# Altium PCB PCB_Bonjour.PcbDoc
Units mm, origin at the board's own origin, x right, y up, seen from the top; angles counter-clockwise.
Board outline 152.4 x 101.6 mm, 2 copper layers (Top Layer, Bottom Layer); 47 components, 43 nets, 163 pads, 0 vias.
Unrouted connection lines stored in the file: 84.
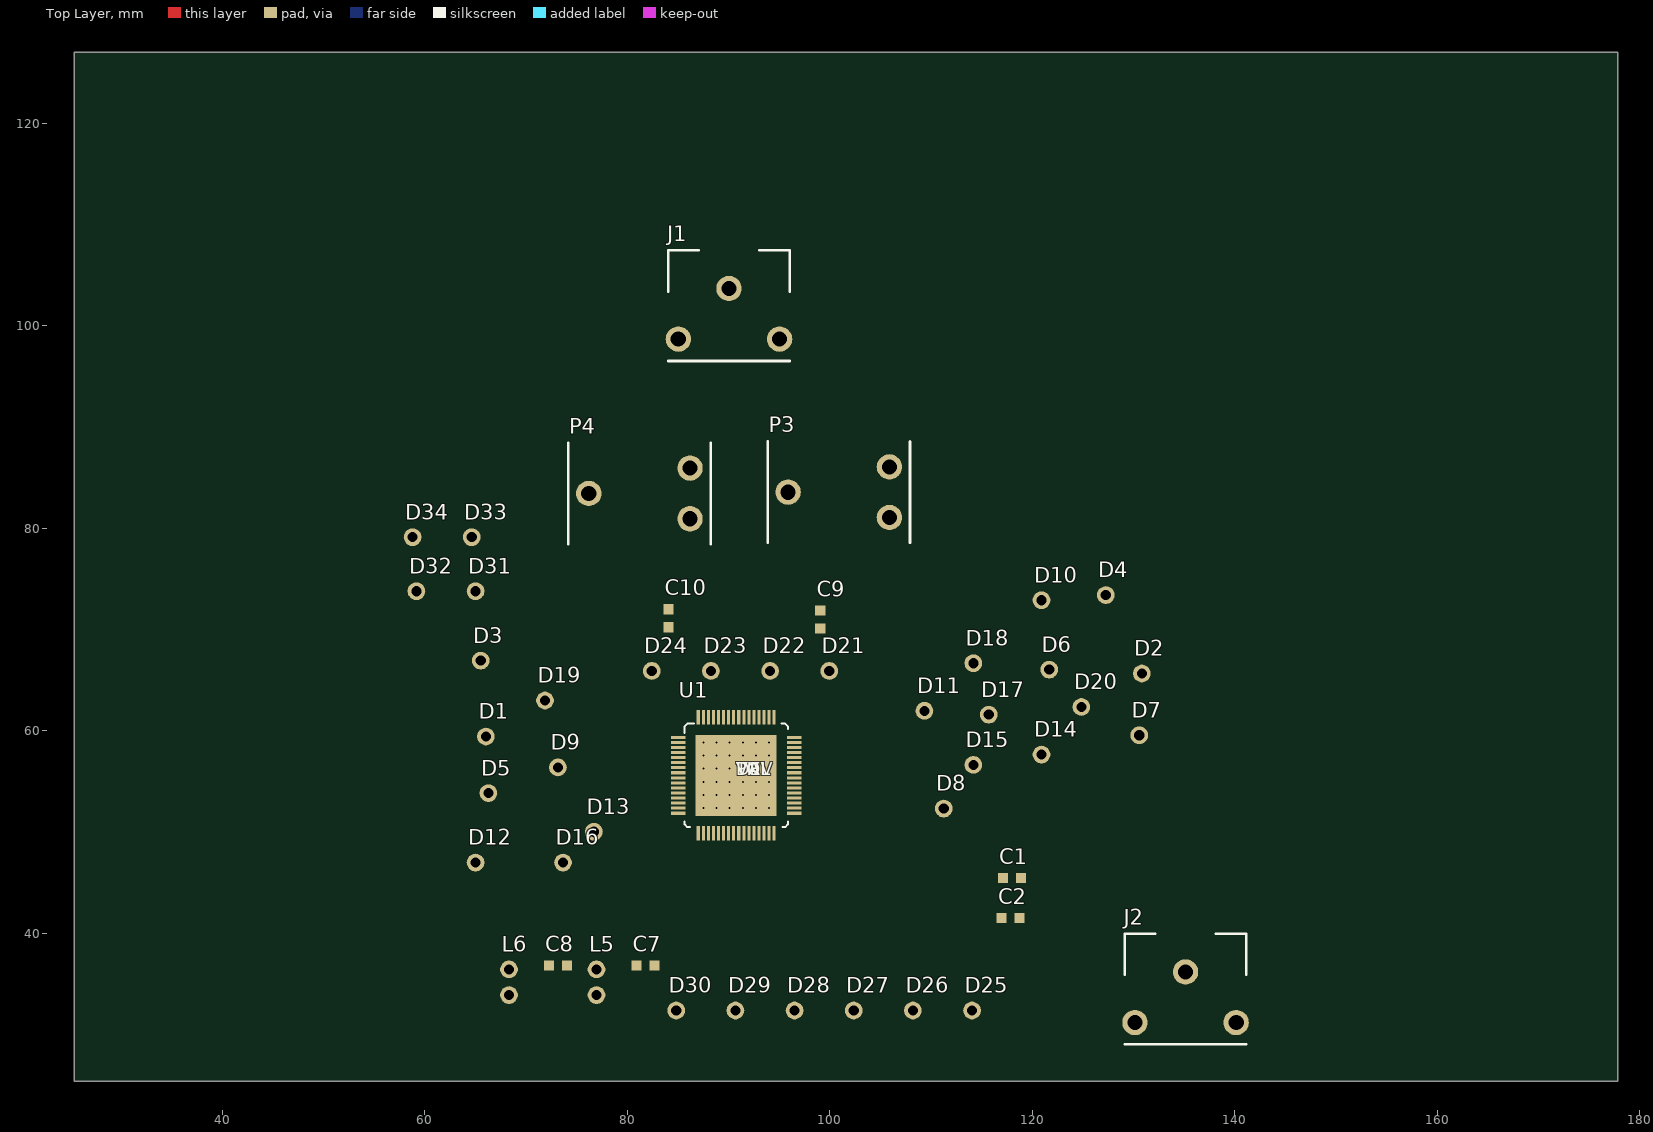
[diagram p0: Top Layer view]
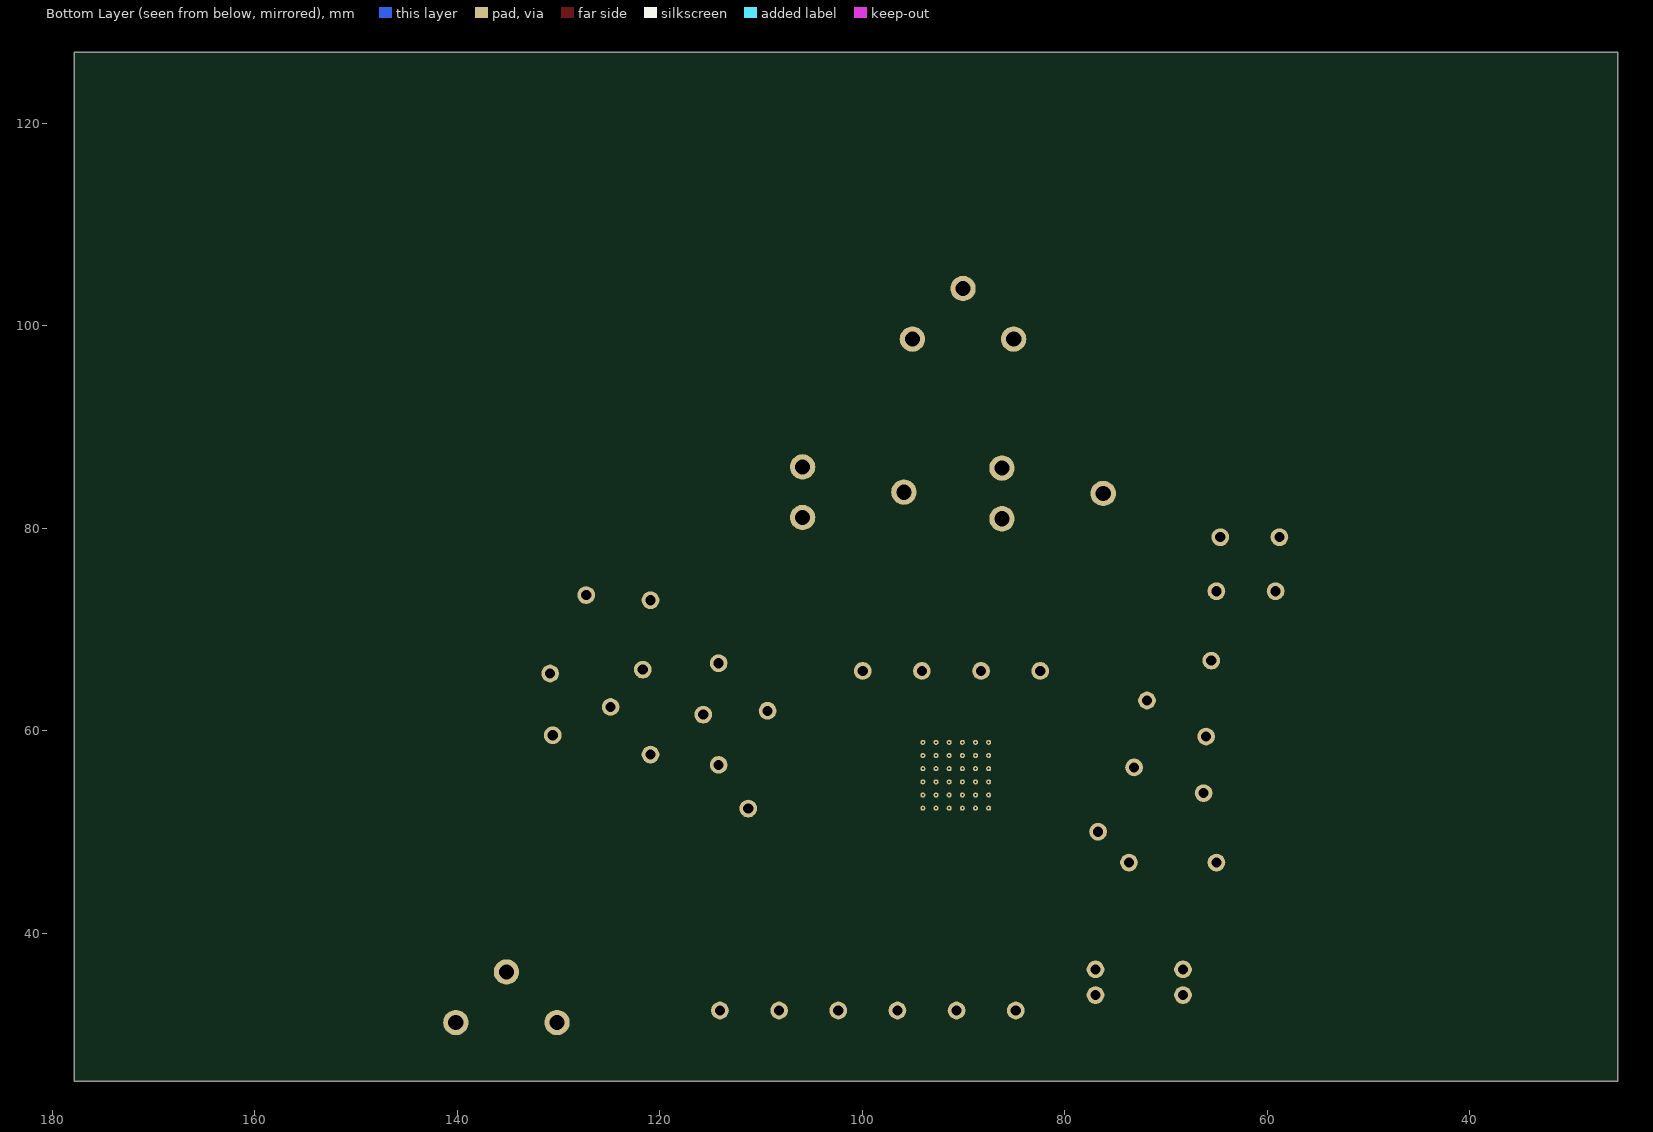
[diagram p1: Bottom Layer view, seen from below]

## Layer stack, top to bottom
Top Solder: solder mask 0.0102, Solder Resist, Dk 3.5
Top Layer: signal copper 0.0356
Dielectric 1: dielectric 0.32, FR-4, Dk 4.8
Bottom Layer: signal copper 0.0356
Bottom Solder: solder mask 0.0102, Solder Resist, Dk 3.5

## Board outline
25.4,25.4 177.8,25.4 177.8,127 25.4,127

## Design rules (kind name [scope] priority, off if disabled: settings)
Clearance [All] p1: gap=0.254 ignorepadtopadclearanceinfootprint=FALSE except(0: Arc-Hole Track-Hole SMDPad-Hole THPad-Hole Via-Hole Fill-Hole Poly-Hole Region-Hole Text-Hole)
PolygonConnect [All] p1: connectstyle=Relief reliefconductorwidth=0.254 reliefentries=4 polygonreliefangle="90 Angle" airgapwidth=0.254
RoutingVias [All] p1: holewidth=0.711 width=1.27 viastyle="Through Hole" minholewidth=0.711 minwidth=1.27 maxholewidth=0.711 maxwidth=1.27
ShortCircuit ShortCircuit_1 [All] p1: allowed=FALSE
ShortCircuit [All] p2: allowed=FALSE
SolderMaskExpansion [All] p1: expansion=0.102
Width [All] p1: maxlimit=0.254 minlimit=0.254 preferedwidth=0.254
29 further rules are at their usual default settings.

## Classes and differential pairs
component class Sh_Outputs_Analog: C1 C2 C7 C8 D25 D26 D27 D28 D29 D30 J2 L5 L6
component class Sh_Inputs_Analog: C9 C10 D21 D22 D23 D24 J1 P3 P4
component class Sh_Controls: D1 D2 D3 D4 D5 D6 D7 D8 D9 D10 D11 D12 D13 D14 D15 D16 D17 D18 D19 D20
component class Sh_ADC-DAC_Main: D31 D32 D33 D34 U1

## Components (designator, comment, footprint, x,y, rotation, side; value= is the part's Value field where it differs from the comment)
C1 "Condo" Condo 117.983,45.466 r0 top
C2 "Condo" Condo 117.856,41.529 r0 top
C7 "Condo" Condo 81.788,36.83 r0 top
C8 "Condo" Condo 73.152,36.83 r0 top
C9 "Condo" Condo 99.06,70.993 r270 top
C10 "Condo" Condo 84.074,71.12 r270 top
D1 "Pad" Pad 66.04,59.436 r0 top
D2 "Pad" Pad 130.81,65.659 r0 top
D3 "Pad" Pad 65.532,66.929 r0 top
D4 "Pad" Pad 127.254,73.406 r0 top
D5 "Pad" Pad 66.294,53.848 r0 top
D6 "Pad" Pad 121.666,66.04 r0 top
D7 "Pad" Pad 130.556,59.563 r0 top
D8 "Pad" Pad 111.252,52.324 r0 top
D9 "Pad" Pad 73.152,56.388 r0 top
D10 "Pad" Pad 120.904,72.898 r0 top
D11 "Pad" Pad 109.347,61.976 r0 top
D12 "Pad" Pad 65.024,46.99 r0 top
D13 "Pad" Pad 76.708,50.038 r0 top
D14 "Pad" Pad 120.904,57.658 r0 top
D15 "Pad" Pad 114.173,56.642 r0 top
D16 "Pad" Pad 73.66,46.99 r0 top
D17 "Pad" Pad 115.697,61.595 r0 top
D18 "Pad" Pad 114.173,66.675 r0 top
D19 "Pad" Pad 71.882,62.992 r0 top
D20 "Pad" Pad 124.841,62.357 r90 top
D21 "Pad" Pad 99.949,65.913 r0 top
D22 "Pad" Pad 94.107,65.913 r90 top
D23 "Pad" Pad 88.265,65.913 r90 top
D24 "Pad" Pad 82.423,65.913 r90 top
D25 "Pad" Pad 114.046,32.385 r90 top
D26 "Pad" Pad 108.204,32.385 r90 top
D27 "Pad" Pad 102.362,32.385 r90 top
D28 "Pad" Pad 96.52,32.385 r90 top
D29 "Pad" Pad 90.678,32.385 r90 top
D30 "Pad" Pad 84.836,32.385 r90 top
D31 "Pad" Pad 65.024,73.787 r0 top
D32 "Pad" Pad 59.182,73.787 r90 top
D33 "Pad" Pad 64.643,79.121 r90 top
D34 "Pad" Pad 58.801,79.121 r90 top
J1 "Jack_femelle" Jack_Femelle 90.043,98.679 r0 top
J2 "Jack_femelle" Jack_Femelle 135.128,31.195 r0 top
L5 "Led" Led 76.962,35.179 r90 top
L6 "Led" Led 68.326,35.179 r90 top
P3 "Potentiomètre" Trimmer 105.885,83.566 r90 top
P4 "Potentiomètre" Trimmer 86.2,83.439 r90 top
U1 "PCM3168APAPR" PAP0064J_N 90.76,55.611 r0 top value=Value

## Footprints (in the part's own frame and the unit in brackets; to place one, negate y for a bottom-side part, rotate by r counter-clockwise, add the part's x,y. Pads: shape width x height; smd on the part's side, far side on the other; paste and mask are expansions set on the pad)
Condo [mm]
  rect 1x1 smd: 1(-0.889,0) 2(0.889,0)
Jack_Femelle [mm]
  round 2.5 hole 1.5: 1(0,5) 2(-5,0) 3(5,0)
  silkscreen extent -6,-2.16 6,8.76
Led [mm]
  round 1.75 hole 1: 1(-1.27,0) 2(1.27,0)
Pad [mm]
  round 1.75 hole 1: 1(0,0)
PAP0064J_N [mm]
  rect 1.45x0.3 smd paste+0 mask+0.051: 1(-5.725,3.75) 2(-5.725,3.25) 3(-5.725,2.75) 4(-5.725,2.25) 5(-5.725,1.75) 6(-5.725,1.25) 7(-5.725,0.75) 8(-5.725,0.25) 9(-5.725,-0.25) 10(-5.725,-0.75) 11(-5.725,-1.25) 12(-5.725,-1.75) 13(-5.725,-2.25) 14(-5.725,-2.75) 15(-5.725,-3.25) 16(-5.725,-3.75) 33(5.725,-3.75) 34(5.725,-3.25) 35(5.725,-2.75) 36(5.725,-2.25) 37(5.725,-1.75) 38(5.725,-1.25) 39(5.725,-0.75) 40(5.725,-0.25) 41(5.725,0.25) 42(5.725,0.75) 43(5.725,1.25) 44(5.725,1.75) 45(5.725,2.25) 46(5.725,2.75) 47(5.725,3.25) 48(5.725,3.75)
  rect 0.3x1.45 smd paste+0 mask+0.051: 17(-3.75,-5.725) 18(-3.25,-5.725) 19(-2.75,-5.725) 20(-2.25,-5.725) 21(-1.75,-5.725) 22(-1.25,-5.725) 23(-0.75,-5.725) 24(-0.25,-5.725) 25(0.25,-5.725) 26(0.75,-5.725) 27(1.25,-5.725) 28(1.75,-5.725) 29(2.25,-5.725) 30(2.75,-5.725) 31(3.25,-5.725) 32(3.75,-5.725) 49(3.75,5.725) 50(3.25,5.725) 51(2.75,5.725) 52(2.25,5.725) 53(1.75,5.725) 54(1.25,5.725) 55(0.75,5.725) 56(0.25,5.725) 57(-0.25,5.725) 58(-0.75,5.725) 59(-1.25,5.725) 60(-1.75,5.725) 61(-2.25,5.725) 62(-2.75,5.725) 63(-3.25,5.725) 64(-3.75,5.725)
  rect 8x8 smd paste-3.987 mask-3.988: 65(0,0)
  round 0.5 / inner round 1.524 / far side round 0.5 hole 0.203 mask-0.241: V(-3.25,-3.25) V(-3.25,-1.95) V(-3.25,-0.65) V(-3.25,0.65) V(-3.25,1.95) V(-3.25,3.25) V(-1.95,-3.25) V(-1.95,-1.95) V(-1.95,-0.65) V(-1.95,0.65) V(-1.95,1.95) V(-1.95,3.25) V(-0.65,-3.25) V(-0.65,-1.95) V(-0.65,-0.65) V(-0.65,0.65) V(-0.65,1.95) V(-0.65,3.25) V(0.65,-3.25) V(0.65,-1.95) V(0.65,-0.65) V(0.65,0.65) V(0.65,1.95) V(0.65,3.25) V(1.95,-3.25) V(1.95,-1.95) V(1.95,-0.65) V(1.95,0.65) V(1.95,1.95) V(1.95,3.25) V(3.25,-3.25) V(3.25,-1.95) V(3.25,-0.65) V(3.25,0.65) V(3.25,1.95) V(3.25,3.25)
  silkscreen extent -5.1,-5.13 5.1,5.1, body extent 0,0 0.25,0.25, height 0.25
Trimmer [mm]
  round 2.5 hole 1.5: 1(-2.5,0) 2(0,10) 3(2.5,0)
  silkscreen extent -5,-2.03 5,12.03

## Part data
U1: "Imported", Manufacturer="Texas Instruments", PartNumber=PCM3168APAPR, RefDes=RefDes, TYPE=TYPE

## Nets (pads, with @x,y where several pads share a name; then routed paths per layer and width w, separated by ;. In a path a pad name is that pad's centre, name@x,y a point inside that pad or via, vN(x,y) a via of type N, cw(c..) or ccw(c..) an arc to the next point about the centre after c; other vN are vias at no path point)
+3.3V: D31.1 D33.1 U1.12 U1.46
+5V: P3.3 P4.3 U1.3 U1.14 U1.34 U1.49
GND: D32.1 D34.1 J1.1 J2.1 L5.2 L6.2 P3.1 P4.1 U1.1 U1.2 U1.11 U1.15 U1.16 U1.18 U1.20 U1.22 U1.24 U1.26 U1.28 U1.30 U1.32 U1.33 U1.47 U1.50 U1.51 U1.53 U1.55 U1.57 U1.59 U1.60 U1.61 U1.63 U1.65
NetC1_1: C1.1 U1.31
NetC1_2: C1.2 D25.1 J2.2
NetC2_1: C2.1 U1.29
NetC2_2: C2.2 D26.1 J2.3
NetC7_1: C7.1 U1.19
NetC7_2: C7.2 L5.1
NetC8_1: C8.1 U1.17
NetC8_2: C8.2 L6.1
NetC9_1: C9.1 J1.2
NetC9_2: C9.2 D21.1 U1.52
NetC10_1: C10.1 J1.3
NetC10_2: C10.2 D22.1 U1.54
NetD1_1: D1.1 U1.8
NetD2_1: D2.1 U1.45
NetD3_1: D3.1 U1.9
NetD4_1: D4.1 U1.44
NetD5_1: D5.1 U1.10
NetD6_1: D6.1 U1.43
NetD7_1: D7.1 U1.42
NetD8_1: D8.1 U1.37
NetD9_1: D9.1 U1.6
NetD10_1: D10.1 U1.48
NetD11_1: D11.1 U1.38
NetD12_1: D12.1 U1.7
NetD13_1: D13.1 U1.4
NetD14_1: D14.1 U1.39
NetD15_1: D15.1 U1.41
NetD16_1: D16.1 U1.13
NetD17_1: D17.1 U1.40
NetD18_1: D18.1 U1.35
NetD19_1: D19.1 U1.5
NetD20_1: D20.1 U1.36
NetD23_1: D23.1 U1.56
NetD24_1: D24.1 U1.58
NetD27_1: D27.1 U1.27
NetD28_1: D28.1 U1.25
NetD29_1: D29.1 U1.23
NetD30_1: D30.1 U1.21
NetP3_2: P3.2 U1.62
NetP4_2: P4.2 U1.64
pads on no net: U1.V

## Text inside footprints (layer, text, board x,y; h text height)
U1: Top Overlay "DEV" at 90.76,55.611 h1.27; Top Overlay "PN" at 90.76,55.611 h1.27; Top Overlay "VAL" at 90.76,55.611 h1.27; Top Overlay "TOL" at 90.76,55.611 h1.27